# EAGLE board arduino-starter-kit-project-2 (EAGLE 9.7.0)

Size 97.78 x 84.71 mm. Coordinates in mm from the lower left corner, seen from the top.
Outline: 0,0 97.78,0 97.78,84.71 0,84.71 0,0
Copper layers (1*16): Top 0.035mm / dielectric 1.5mm / Bottom 0.035mm
Design rules "default": minimum track width 6mil, minimum drill 0.35mm, track to track 6mil, track to pad 6mil, pad to pad 6mil, via to via 6mil, smd to smd 6mil, copper to edge 40mil, drill to drill 6mil, minimum pad ring 10mil, minimum via ring 8mil, stop-mask expansion 4mil, vias tented up to drill 0mil, thermal gap 10mil

## Footprints (pad centres in the part's own frame; a part is rotated, then mirrored left to right if it is on the bottom)
LEDRD254W60D565H860B = drill 0.981 pad 1.581: 1 -1.27,0; 2 1.27,0
LEDRD254W60D565H860B_G = drill 0.981 pad 1.581: 1 -1.27,0; 2 1.27,0
RESAD1016W63L850D250B = drill 0.83 pad 1.43: 1 -5.08,0; 2 5.08,0
SWITCH-MOMENTARY-PTH-6.5MM = drill 1.016 pad 1.88: 1 -3.251,2.261; 2 3.251,2.261; 3 -3.251,-2.261; 4 3.251,-2.261
ARDUINO-UNO-R3-SHIELD = drill 1.016 pad 1.88: 3.3V 24.13,-2.54; 5V 24.13,0; A0 24.13,12.7; A1 24.13,15.24; A2 24.13,17.78; A3 24.13,20.32; A4 24.13,22.86; A5 24.13,25.4; AREF -24.13,-13.97; D2 -24.13,20.32; D3 -24.13,17.78; D4 -24.13,15.24; D5 -24.13,12.7; D6 -24.13,10.16; D7 -24.13,7.62; D8 -24.13,3.81; D9 -24.13,1.27; D10 -24.13,-1.27; D11 -24.13,-3.81; D12 -24.13,-6.35; D13 -24.13,-8.89; GND@0 24.13,2.54; GND@1 24.13,5.08; GND@2 -24.13,-11.43; IOREF 24.13,-7.62; NC 24.13,-10.16; RES 24.13,-5.08; RX -24.13,25.4; SCL -24.13,-19.05; SDA -24.13,-16.51; TX -24.13,22.86; VIN 24.13,7.62

## Placement (x,y rotation side)
D2  RED  [LEDRD254W60D565H860B]  11.18,22.84 270 top
D3  RED  [LEDRD254W60D565H860B]  11.18,15.22 270 top
D4  GREEN  [LEDRD254W60D565H860B_G]  11.18,7.6 270 top
R10  10k  [RESAD1016W63L850D250B]  26.42,67.29 0 top
R220_RESISTOR  220  [RESAD1016W63L850D250B]  26.42,21.57 0 top
R220_RESISTOR1  220  [RESAD1016W63L850D250B]  26.42,13.95 0 top
R220_RESISTOR2  220  [RESAD1016W63L850D250B]  26.42,6.33 0 top
SSWITCH  SWITCH_MOMENTARY  [SWITCH-MOMENTARY-PTH-6.5MM]  7.37,64.75 0 top
U1  ARDUINO-UNO-R3-SHIELD  [ARDUINO-UNO-R3-SHIELD]  67.93,50.19 0 top

## Library data of the parts
D2 D3 = Tinkercad; CATEGORY: Opto-Electronic; SUB-CATEGORY: LED; VALUE: LED_RED
D4 = Tinkercad; CATEGORY: Opto-Electronic; SUB-CATEGORY: LED; VALUE: LED_GREEN
R10 R220_RESISTOR R220_RESISTOR1 R220_RESISTOR2 SSWITCH U1 = Tinkercad

## Nets
D2_C: D2.2 R220_RESISTOR.1
D3_C: D3.2 R220_RESISTOR1.1
D4_C: D4.2 R220_RESISTOR2.1
U1_5V: SSWITCH.3 SSWITCH.4 U1.5V
U1_D2: R10.1 SSWITCH.1 SSWITCH.2 U1.D2
U1_D3: D4.1 U1.D3
U1_D4: D2.1 U1.D4
U1_D5: D3.1 U1.D5
U1_GND: R10.2 R220_RESISTOR1.2 R220_RESISTOR2.2 R220_RESISTOR.2 U1.GND@0 U1.GND@1 U1.GND@2

## Tracks (layer width: path | path; a pad name or v marks a point on that pad's centre or on a via)
D2_C  (1 unrouted)
D3_C  (1 unrouted)
D4_C  (1 unrouted)
U1_5V  (2 unrouted)
U1_D2  (3 unrouted)
U1_D3  (1 unrouted)
U1_D4  (1 unrouted)
U1_D5  (1 unrouted)
U1_GND  (6 unrouted)